# Altium PCB TS.PcbDoc
Units mm, origin at the board's own origin, x right, y up, seen from the top; angles counter-clockwise.
Board outline 46.25 x 27.25 mm, 2 copper layers (Top Layer, Bottom Layer), stack 0.325 mm thick; 71 components, 47 nets, 261 pads, 130 vias.
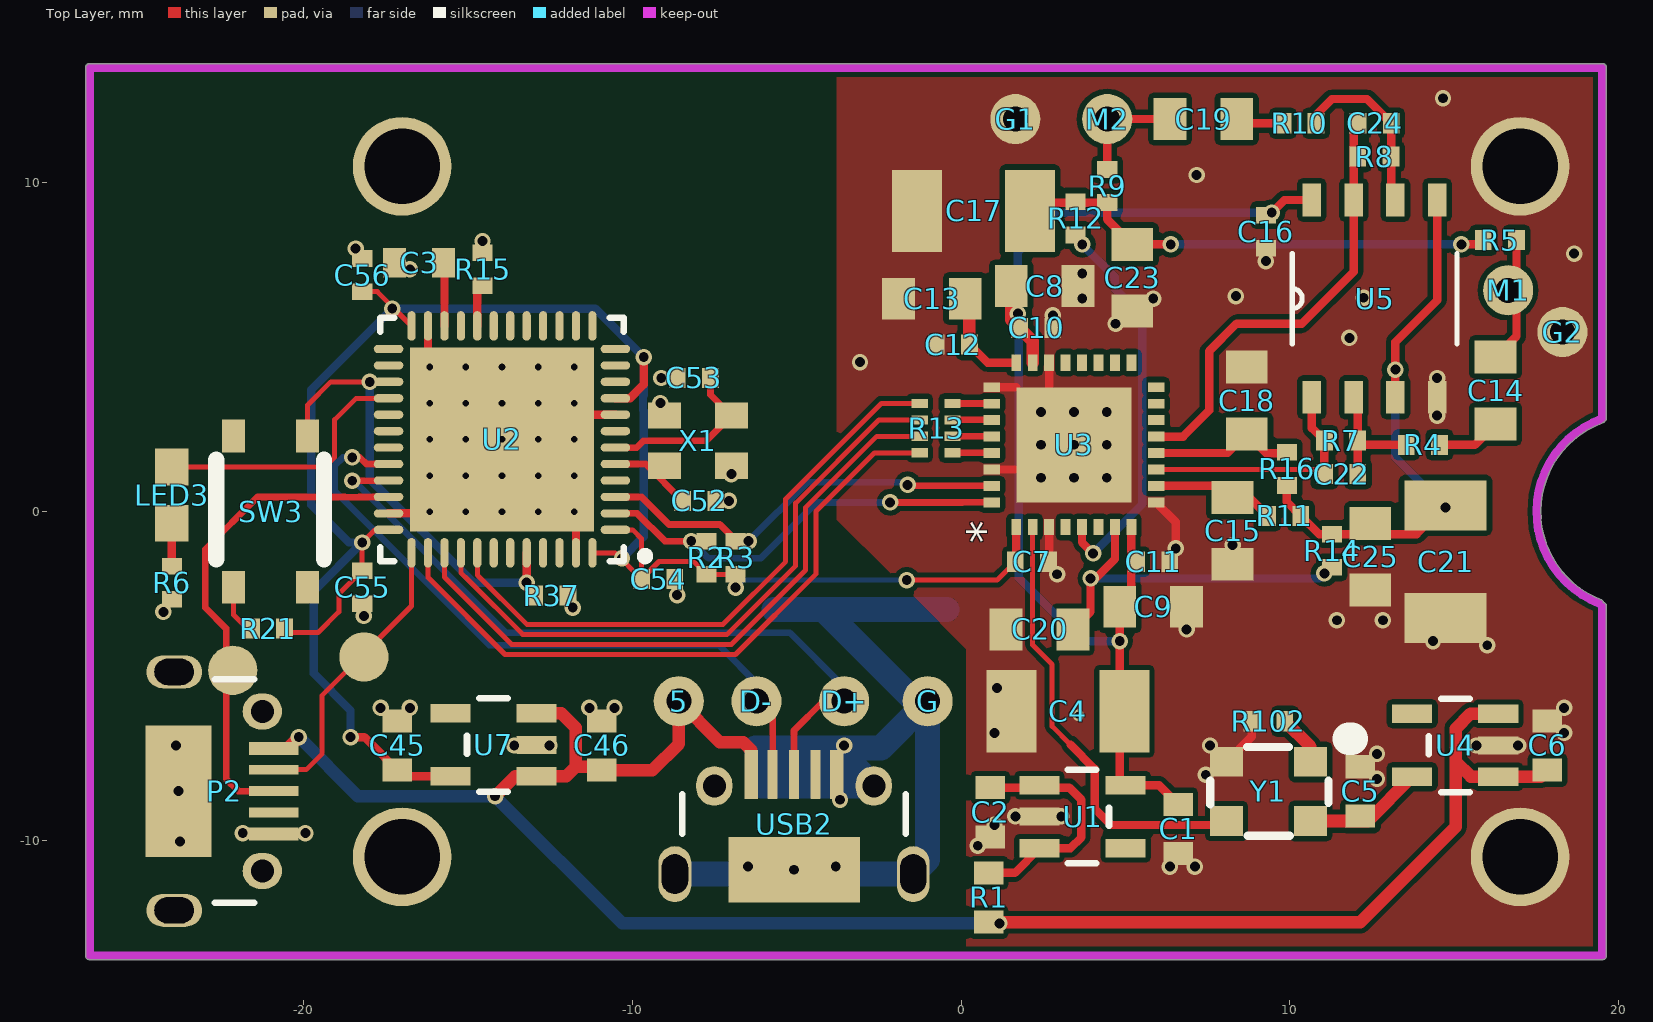
[diagram p0: Top Layer view]
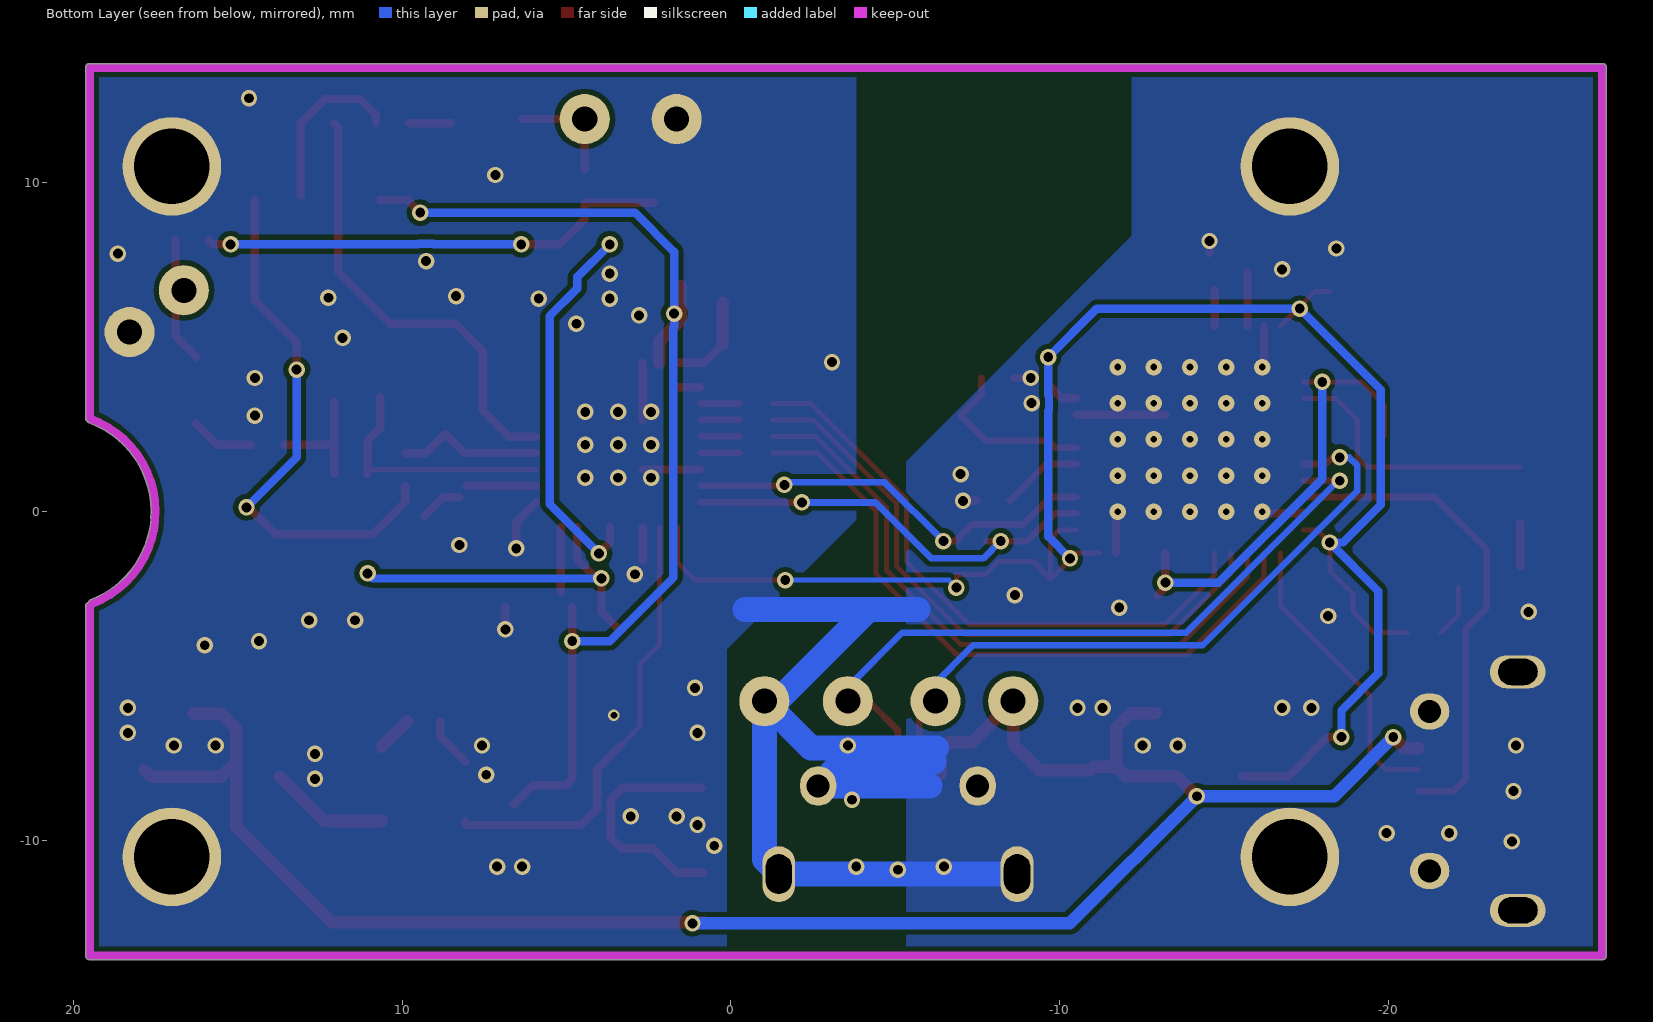
[diagram p1: Bottom Layer view, seen from below]

## Layer stack, top to bottom
Top Solder: solder mask 0.0102, Solder Resist, Dk 3.5
Top Layer: signal copper 0.0356
Dielectric 1: core 0.254, FR-4, Dk 4.2
Bottom Layer: signal copper 0.0356
Bottom Solder: solder mask 0.0102, Solder Resist, Dk 3.5

## Board outline
-26.627,-13.5 ccw(c-26.5,-13.5) -26.5,-13.627 19.5,-13.627 ccw(c19.5,-13.5) 19.627,-13.5 19.627,-2.882 ccw(c19.5,-2.882) 19.537,-2.76 ccw(c19.415,-2.797) 19.461,-2.678 cw(c20.5,0) 19.507,2.696 cw(c20.5,0) 19.508,2.696 ccw(c19.464,2.815) 19.554,2.726 19.554,2.725 19.59,2.762 19.59,2.761 ccw(c19.5,2.852) 19.627,2.852 19.627,13.5 ccw(c19.5,13.5) 19.5,13.627 -26.5,13.627 ccw(c-26.5,13.5) -26.627,13.5

## Design rules (kind name [scope] priority, off if disabled: settings)
Clearance Clearance_1 [(InNamedPolygon('Bottom Layer-No Net')) vs Not InNet('GND')] p1: gap=0.381 ignorepadtopadclearanceinfootprint=FALSE except(0: Arc-Hole Track-Hole SMDPad-Hole THPad-Hole Via-Hole Fill-Hole Poly-Hole Region-Hole Text-Hole)
Clearance [All] p2: gap=0.152 ignorepadtopadclearanceinfootprint=FALSE except(0: Arc-Hole Track-Hole SMDPad-Hole THPad-Hole Via-Hole Fill-Hole Poly-Hole Region-Hole Text-Hole)
DiffPairsRouting [All] p1: maxlimit=0.254 minlimit=0.254 mostfreqgap=0.254 toplayer_minwidth=0.152 toplayer_maxwidth=0.381 toplayer_prefwidth=0.381 bottomlayer_minwidth=0.152 bottomlayer_maxwidth=0.381 bottomlayer_prefwidth=0.381 maxuncoupledlength=12.7
MinimumSolderMaskSliver [All] p1 off: minsoldermaskwidth=0.254
PlaneClearance [All] p1: clearance=0.254
PlaneConnect [All] p1: planeconnectstyle=Direct reliefexpansion=0.508 reliefentries=4 reliefconductorwidth=0.254 reliefairgap=0.254
PolygonConnect [All] p1: connectstyle=Direct reliefconductorwidth=0.254 reliefentries=4 polygonreliefangle="90 Angle" airgapwidth=0.254
RoomDefinition audio [InComponentClass('audio')] p1 off: confinementstyle=ConfineIn formatcopy=TRUE lockcomponents=FALSE outline -45.904,-51.473 -32.904,-51.473 -32.904,-41.723 -45.904,-41.723
RoomDefinition power [InComponentClass('power')] p2 off: confinementstyle=ConfineIn formatcopy=TRUE lockcomponents=FALSE outline -45.904,-33.223 -18.154,-33.223 -18.154,-25.973 -45.904,-25.973
RoomDefinition MCU [InComponentClass('MCU')] p3 off: confinementstyle=ConfineIn formatcopy=TRUE lockcomponents=FALSE outline -33.399,-50.717 26.164,-50.717 26.164,-44.621 -33.399,-44.621
RoutingVias [All] p1: holewidth=0.305 width=0.508 viastyle="Through Hole" minholewidth=0.3 minwidth=0.5 maxholewidth=0.711 maxwidth=1.27
SilkToBoardRegionClearance [All] p1 off:
SilkToSilkClearance [All] p1 off: silktosilkclearance=0.254
SilkToSolderMaskClearance [IsPad] p1 off: minsilkscreentomaskgap=0.254 clearancetoexposedcopper=TRUE
SolderMaskExpansion [All] p1: expansion=0.102
Width [All] p1: maxlimit=1.524 minlimit=0.152 preferedwidth=0.152
23 further rules are at their usual default settings.

## Classes and differential pairs
component class power: C1 C2 C4 C5 C6 C45 C46 R1 U1 U4 U7
component class MCU: 5 C3 C52 C53 C54 C55 C56 D+ D- G LED3 P2 R6 R13 R15 R21 R28 R37 SW3 U2 USB2 X1
component class audio: C7 C8 C9 C10 C11 C12 C13 C14 C15 C16 C17 C18 C19 C20 C21 C22 C23 C24 C25 G1 G2 M1 M2 R2 R3 R4 R5 R7 R8 R9 R10 R11 R12 R14 R16 R102 U3 U5 Y1

## Components (designator, comment, footprint, x,y, rotation, side; value= is the part's Value field where it differs from the comment)
5 "TestPad" TestPad -8.585,-5.766 r90 top
C1 "4.7uF" 0603L 6.604,-9.652 r90 top
C2 "4.7uF" 0603L 0.889,-9.144 r90 top
C3 "Cap" 0603L -16.485,7.569 r0 top value=4.7uF
C4 "220uF,Tan" 1210 3.251,-6.071 r0 top
C5 "4.7uF" 0603L 12.141,-8.509 r270 top
C6 "4.7uF" 0603L 17.831,-7.112 r270 top
C7 "0.1uF" 0402 2.159,-1.524 r180 top
C8 "4.7uF" 0805 2.54,6.858 r180 top
C9 "4.7uF" 0805 5.842,-2.896 r180 top
C10 "0.1uF" 0402 2.286,5.588 r180 top
C11 "0.1uF" 0402 5.842,-1.524 r180 top
C12 "0.1uF" 0402 -0.254,5.08 r0 top
C13 "4.7uF" 0805 -0.889,6.477 r0 top
C14 "10uF" 0805 16.256,3.683 r90 top
C15 "10uF" 0805 8.255,-0.584 r270 top
C16 "4.7uF" 0402 9.271,8.509 r90 top
C17 "200uF" 1210 0.381,9.144 r0 top
C18 "10uF" 0805 8.687,3.378 r270 top
C19 "10uF" 0805 7.366,11.938 r180 top
C20 "4.7uF" 0805 2.388,-3.581 r0 top
C21 "200uF" 1210 14.732,-1.524 r90 top
C22 "NC" 0402 11.557,1.143 r0 top
C23 "4.7uF" 0805 5.207,7.112 r90 top
C24 "100k" 0402 12.573,11.811 r0 top
C25 "4.7uF" 0805 12.446,-1.372 r90 top
C45 "4.7uF" 0603L -17.145,-7.112 r270 top
C46 "4.7uF" 0603L -10.922,-7.112 r270 top
C52 "Cap" 0402 -7.962,0.328 r180 top value=20pF
C53 "Cap" 0402 -8.128,4.064 r0 top value=20pF
C54 "Cap" 0402 -9.212,-2.053 r180 top value=0.1uF
C55 "Cap" 0402 -18.212,-2.303 r90 top value=0.1uF
C56 "Cap" 0402 -18.212,7.197 r270 top value=0.1uF
D+ "TestPad" TestPad -3.556,-5.766 r0 top
D- "TestPad" TestPad -6.223,-5.766 r0 top
G "TestPad" TestPad -1.016,-5.766 r90 top
G1 "TestPad" TestPad 1.651,11.938 r0 top
G2 "TestPad" TestPad 18.288,5.461 r0 top
LED3 "LED0" 0603 -24.003,0.508 r270 top
M1 "TestPad" TestPad 16.637,6.731 r0 top
M2 "TestPad" TestPad 4.445,11.938 r0 top
P2 "SWD_MicroUSB" MICRO-YZX -26.75,-8.5 r270 top
R1 "FB" 0603L 0.838,-11.735 r270 top value=0Ohm
R2 "Res2" 0402 -7.747,-1.397 r270 top value=10k
R3 "Res2" 0402 -6.858,-1.397 r270 top value=10k
R4 "1k" 0402 14.046,2.032 r180 top
R5 "NC" 0402 16.383,8.255 r0 top
R6 "10k" 0402 -24.003,-2.159 r270 top value=0Ohm
R7 "100k" 0402 11.557,2.159 r180 top
R8 "NC" 0402 12.573,10.795 r180 top
R9 "NC" 0402 4.445,9.906 r270 top
R10 "1k" 0402 10.287,11.811 r0 top
R11 "NC" 0402 9.83,-0.127 r180 top
R12 "NC" 0402 3.48,8.915 r90 top
R13 "Res*4" 0402X4 -0.762,2.54 r180 top value=200Ohm
R14 "NC" 0402 11.278,-1.194 r90 top
R15 "10k" 0402 -14.554,7.366 r90 top value=0Ohm
R16 "NC" 0402 9.906,1.295 r90 top
R21 "1k" 0402 -21.082,-3.556 r0 top value=0Ohm
R37 "Res2" 0402 -12.462,-2.553 r0 top value=10k
R102 "NC" 0402 9.347,-6.375 r180 top
SW3 "SW-PB" SW3x4 -21,0 r270 top
U1 "LP5907" SOT23-5 3.683,-9.271 r270 top
U2 "STM32F401CCU6" STM-UFQFPN48_N -13.962,2.197 r180 top
U3 "ADAU1761" ADAU1761 3.429,2.032 r90 top
U4 "LP5907" SOT23-5 15.037,-7.112 r90 top
U5 "OP-2" SO8 12.573,6.477 r90 top
U7 "LP5907" SOT23-5 -14.213,-7.099 r90 top
USB2 "USB Micro Type B" MICRO-YZX -5.08,-13.843 r0 top
X1 "24.000 KHz 3.2x2.5mm 8-10pf" OSCILLATOR-2.5x2.0 -8.001,2.159 r0 top
Y1 "OSC_40M" TXC_7Q 9.347,-8.509 r180 top

## Footprints (in the part's own frame and the unit in brackets; to place one, negate y for a bottom-side part, rotate by r counter-clockwise, add the part's x,y. Pads: shape width x height; smd on the part's side, far side on the other; paste and mask are expansions set on the pad)
0402 [mil] "0402-RES"
  rect 20x24 smd: 1(-19.68,0) 2(20,0)
0402X4 [mm]
  rect 0.5x0.28 smd: 1(-0.5,0.75) 2(-0.5,0.25) 3(-0.5,-0.25) 4(-0.5,-0.75) 5(0.5,-0.75) 6(0.5,-0.25) 7(0.5,0.25) 8(0.5,0.75)
0603 [mil] "0603-RES"
  rect 44x40 smd: 1(-33.46,0) 2(34,0)
  body extent -31,-16 31,16, height 31
0603L [mm]
  rect 0.7x0.9 smd: 1(-0.75,0) 2(0.75,0)
  body extent -0.8,-0.4 0.8,0.4, height 0.8
0805 [mm]
  rect 1x1.27 smd: 1(-1.016,0) 2(1.016,0)
  body extent -1.27,-0.76 1.27,0.76, height 0.8
1210 [mm]
  rect 1.52x2.5 smd: 1(-1.715,0) 2(1.715,0)
ADAU1761 [mm]
  rect 3.5x3.5 smd: 0(0,0)
  rect 0.5x0.3 smd: 1(-2.5,1.75) 2(-2.5,1.25) 3(-2.5,0.75) 4(-2.5,0.25) 5(-2.5,-0.25) 6(-2.5,-0.75) 7(-2.5,-1.25) 8(-2.5,-1.75) 17(2.5,-1.75) 18(2.5,-1.25) 19(2.5,-0.75) 20(2.5,-0.25) 21(2.5,0.25) 22(2.5,0.75) 23(2.5,1.25) 24(2.5,1.75)
  rect 0.3x0.5 smd: 9(-1.75,-2.5) 10(-1.25,-2.5) 11(-0.75,-2.5) 12(-0.25,-2.5) 13(0.25,-2.5) 14(0.75,-2.5) 15(1.25,-2.5) 16(1.75,-2.5) 25(1.75,2.5) 26(1.25,2.5) 27(0.75,2.5) 28(0.25,2.5) 29(-0.25,2.5) 30(-0.75,2.5) 31(-1.25,2.5) 32(-1.75,2.5)
  body extent -2.5,-2.5 2.5,2.5, height 0.8
MICRO-YZX [mm]
  rect 0.4x1.5 smd: 1(-1.3,5.85) 5(1.3,5.85)
  rect 0.3x1.5 smd: 2(-0.65,5.85) 3(0,5.85) 4(0.65,5.85)
  oval 1x1.7 hole 0.8 slot 1.2 at 90 deg: 5(-3.625,2.82) 5(3.625,2.82)
  oval 1.1x1.2 hole 0.7: 5(-2.425,5.5) 5(2.425,5.5)
  rect 4x2 smd: 5(0,2.95)
  silkscreen extent -3.4,4.05 3.4,5.25, body extent -4.02,0.33 3.98,5.93, height 2.6
OSCILLATOR-2.5x2.0 [mm] "OSCILLATOR-3.2X2.5"
  rect 1x0.8 smd: 1(-1.016,-0.762) 2(1.016,-0.762) 3(1.016,0.762) 4(-1.016,0.762)
  body extent -1.27,-1.02 1.27,1.02, height 0.9
SO8 [mm]
  rect 1x0.559 smd: 1(-3,1.905) 2(-3,0.635) 3(-3,-0.635) 4(-3,-1.905) 5(3,-1.905) 6(3,-0.635) 7(3,0.635) 8(3,1.905)
  silkscreen extent -1.37,-2.5 1.37,2.5, body extent -3,-2.45 3,2.45, height 1.63
SOT23-5 [mil] "SOT23-5"
  rect 22x48 smd: 1(-37.4,-51.19) 2(0,-51.19) 3(38,-51.19) 4(38,52) 5(-37.4,52)
  silkscreen extent -56,-17 56,32
STM-UFQFPN48_N [mm] "QFN, 48-Leads, Body 7.1x7.1mm, Pitch 0.5mm, Thermal Pad 5.6x5.6mm, IPC Medium Density"
  oval 0.9x0.25 smd: 1(-3.45,2.75) 2(-3.45,2.25) 3(-3.45,1.75) 4(-3.45,1.25) 5(-3.45,0.75) 6(-3.45,0.25) 7(-3.45,-0.25) 8(-3.45,-0.75) 9(-3.45,-1.25) 10(-3.45,-1.75) 11(-3.45,-2.25) 12(-3.45,-2.75) 25(3.45,-2.75) 26(3.45,-2.25) 27(3.45,-1.75) 28(3.45,-1.25) 29(3.45,-0.75) 30(3.45,-0.25) 31(3.45,0.25) 32(3.45,0.75) 33(3.45,1.25) 34(3.45,1.75) 35(3.45,2.25) 36(3.45,2.75)
  oval 0.25x0.9 smd: 13(-2.75,-3.45) 14(-2.25,-3.45) 15(-1.75,-3.45) 16(-1.25,-3.45) 17(-0.75,-3.45) 18(-0.25,-3.45) 19(0.25,-3.45) 20(0.75,-3.45) 21(1.25,-3.45) 22(1.75,-3.45) 23(2.25,-3.45) 24(2.75,-3.45) 37(2.75,3.45) 38(2.25,3.45) 39(1.75,3.45) 40(1.25,3.45) 41(0.75,3.45) 42(0.25,3.45) 43(-0.25,3.45) 44(-0.75,3.45) 45(-1.25,3.45) 46(-1.75,3.45) 47(-2.25,3.45) 48(-2.75,3.45)
  rect 5.6x5.6 smd: 49(0,0)
  silkscreen extent -4.48,-3.7 3.7,3.7, body extent -3.55,-3.55 3.55,3.55, height 0.6
SW3x4 [mm]
  rect 1x0.7 smd: 1(-2.3,1.125) 2(2.3,-1.125) 3(2.3,1.125) 4(-2.3,-1.125)
  silkscreen extent -1.58,-1.65 1.45,1.63, body extent -2,-1.5 2,1.5, height 2.6
TestPad [mil]
  round 60 hole 30: 1(0,0)
TXC_7Q [mm]
  rect 1x0.9 smd: 1(-1.275,-0.9) 2(1.275,-0.9) 3(1.275,0.9) 4(-1.275,0.9)
  silkscreen extent -2.52,-1.6 1.78,1.35

## Part data
C1 C2 C4 C5 C6 C7 C8 C9 C10 C11 C12 C13 C14 C15 C16 C17 C18 C19 C20 C21 C22 C23 C24 C25 C45 C46: library part Cap, "Capacitor", LatestRevisionDate=17-Jul-2002, LatestRevisionNote="Re-released for DXP Platform.", PackageDescription="Radial Cap, Thru-Hole; 2 Leads; 0.3 in Pin Spacing", PackageReference=RAD-0.3, Published=8-Jun-2000, Publisher="Altium Limited"
C3 C52 C53 C54 C55 C56: "Capacitor", LatestRevisionDate=17-Jul-2002, LatestRevisionNote="Re-released for DXP Platform.", PackageDescription="Radial Cap, Thru-Hole; 2 Leads; 0.3 in Pin Spacing", PackageReference=RAD-0.3, Published=8-Jun-2000, Publisher="Altium Limited"
LED3: "Typical INFRARED GaAs LED", LatestRevisionDate=08-Jul-2005, LatestRevisionNote="Mech Layer 1 removed.", PackageDescription="LED; 2 Leads", PackageReference=LED-0, Published=8-Jun-2000, Publisher="Altium Limited"
P2: "Connector SMD USB Micro Type B middle mount", Manufacturer 1="Molex Inc", Package / Case=SMD, Supplier Part Number 1=WM17142CT-ND, SCDType=undef, Supplier 1=Digi-Key
R1 R4 R5 R6 R7 R8 R9 R10 R11 R12 R14 R15 R16 R21 R102: library part Res2, "Resistor", LatestRevisionDate=17-Jul-2002, LatestRevisionNote="Re-released for DXP Platform.", PackageDescription="Axial Device, Thru-Hole; 2 Leads; 0.4 in Pin Spacing", PackageReference=AXIAL-0.4, Published=8-Jun-2000, Publisher="Altium Limited"
R2 R3 R13 R37: "Resistor", LatestRevisionDate=17-Jul-2002, LatestRevisionNote="Re-released for DXP Platform.", PackageDescription="Axial Device, Thru-Hole; 2 Leads; 0.4 in Pin Spacing", PackageReference=AXIAL-0.4, Published=8-Jun-2000, Publisher="Altium Limited"
SW3: "Switch", LatestRevisionDate=17-Jul-2002, LatestRevisionNote="Re-released for DXP Platform.", PackageDescription="Switch; 2 Leads", PackageReference=SPST-2, Published=24-Mar-1999, Publisher="Altium Limited"
U2: "ARM Cortex-M4 32-bit MCU+FPU, 105 DMIPS, 256 kB Flash, 64 kB Internal RAM, 36 I/Os, 48-pin UFQFPN, -40 to 85 degC, Tray", I/Os (High Current)=36, Manufacturer=STMicroelectronics, Operating Frequency(F) (Processor speed) (MHz)=84, Supplier Part Number 1=19X6217, Supply Voltage(Vcc) max (V)=3.6, Supply Voltage(Vcc) min (V)=1.8, ComponentLink1Description="Manufacturer URL", ComponentLink1URL=http://www.st.com/web/en/home.html, ComponentLink2Description=Datasheet, ComponentLink2URL=http://www.st.com/st-web-ui/static/active/en/resource/technical/document/data_brief/DM00071938.pdf, ComponentLink3Description="Package Specification", ComponentLink3URL=http://www.st.com/st-web-ui/static/active/en/resource/technical/document/data_brief/DM00071938.pdf, Core="ARM Cortex-M4", DatasheetVersion="Rev. 1", FLASH Size (Prog) (kB)=256, Internal RAM Size (kB)=64, Mounting Technology="Surface Mount", PackageDescription="48-Pin Ultra Thin Fine Pitch Quad Flat No-Lead, 7 x 7 x 0.6 mm Body, 0.5 mm Pitch, Exposed Pad", PackageReference=UFQFPN48, PackageVersion="Rev. 1, 04/2013", Packing=Tray, PartNumber=STM32F401CCU6, Supplier 1=Newark, Supplier 2=Mouser, Supplier Part Number 2=511-STM32F401CCU6
USB2: library part USB_Micro_TypeB, "Connector SMD USB Micro Type B middle mount", Manufacturer 1="Molex Inc", Manufacturer Part Number 1=47491-0001, Package / Case=SMD, Supplier Part Number 1=WM17142CT-ND, SCDType=undef, Supplier 1=Digi-Key
X1: library part OSCILLATOR-3.2X2.5, "Crystal Oscillator in 3.2x2.5 SMD"

## Free pads (board coordinates)
  round 1.5 smd: 0(-18.161,-4.42) 8(-22.149,-4.826)
  round 3 hole 2.3: 7(-17,-10.5) 7(-17,10.5) 7(17,-10.5) 7(17,10.5)

## Via types
v1: diameter 0.5, hole 0.3, Top Layer to Bottom Layer, 104 vias
v2: diameter 0.5, hole 0.2, Top Layer to Bottom Layer, 25 vias
v3: diameter 0.35, hole 0.2, Top Layer to Bottom Layer, 1 vias

## Nets (pads, with @x,y where several pads share a name; then routed paths per layer and width w, separated by ;. In a path a pad name is that pad's centre, name@x,y a point inside that pad or via, vN(x,y) a via of type N, cw(c..) or ccw(c..) an arc to the next point about the centre after c; other vN are vias at no path point)
3.3A: C1.2 C4.2 C8.2 C9.2 C10.2 C11.2 C16.2 U1.5 U3.8 U3.23 U5.8 | length 35.3
  Top Layer w0.254: C9.2 v1(4.826,-3.937) 4.826,-8.143 U1.5 6.023,-8.321 C1.2 ; C9.2@5.179,-2.441 U3.8 ; v1(9.449,9.093) 9.833,9.477 U5.8
  Top Layer w0.381: C8.2 1.524,5.842 C10.2 2.179,5.187 U3.23
  Bottom Layer w0.254: v1(4.826,-3.937) 3.683,-3.937 1.753,-2.007 1.753,5.588 1.727,5.613 v1(1.727,6.02) 1.727,7.899 2.921,9.093 v1(9.449,9.093)
3.3Clock: C5.2 U4.5 Y1.4 | length 3.7
  Top Layer w0.381: Y1.4 12.369,-9.409 U4.5
3.3D: C7.2 C45.2 C54.2 C55.2 C56.2 R2.2 R3.2 R21.2 U2.1 U2.9 U2.24 U2.36 U2.48 U3.1 U7.5 | length 60.7
  Top Layer w0.152: R21.2@-20.574,-3.683 -19.558,-3.683 -18.923,-3.048 -18.923,-2.506 C55.2 v1(-18.212,-0.94) -17.825,-0.553 U2.36 ; C56.2 -17.754,6.689 U2.24 ; U2.48 -10.52,-1.253 C54.2 ; U2.1 -9.988,-0.553 -9.72,-0.821 C54.2 ; v1(-6.858,-2.311) R3.2 R2.2 -8.132,-1.52 -9.187,-1.52 C54.2 ; v1(-1.651,-2.083) 1.092,-2.083 C7.2
  Top Layer w0.254: v1(-18.567,-6.858) -18.149,-6.858 -16.958,-8.049 U7.5 ; U2.9 -10.066,3.447 -9.652,3.861 v1(-9.652,4.699) ; C7.2@1.679,-1.496 U3.1
  Bottom Layer w0.152: v1(-6.858,-2.311) -6.629,-2.083 v1(-1.651,-2.083)
  Bottom Layer w0.254: v1(-18.567,-6.858) -18.567,-6.042 -19.685,-4.925 -19.685,-2.413 v1(-18.212,-0.94) -18.618,-0.94 -19.761,0.203 -19.761,3.708 v1(-17.297,6.172) -11.125,6.172 v1(-9.652,4.699) -9.652,3.543 -9.673,3.521 -9.673,3.083 -9.652,3.061 -9.652,-0.762 v1(-10.312,-1.422)
5V: 5.1 C6.2 C46.2 P2.1 R1.2 U4.1 U4.3 U7.1 U7.3 USB2.1 | length 61.1
  Top Layer w0.381: P2.1 -20.484,-7.2 v1(-20.142,-6.858) ; v1(-14.169,-8.657) -13.561,-8.049 U7.1 -12.011,-8.049 -11.715,-7.753 ; U7.3 -12.154,-6.134 -11.715,-6.573 -11.715,-7.753 ; C46.2@-11.031,-7.753 -11.715,-7.753 ; C46.2 -9.386,-7.862 -8.585,-7.061 5.1 -7.341,-7.01 -6.629,-7.01 -6.38,-7.26 USB2.1 ; R1.2 12.141,-12.485 15.037,-9.589 15.037,-7.595 ; U4.3 15.494,-6.147 15.037,-6.604 15.037,-7.595 ; C6.2 17.631,-8.062 U4.1 15.504,-8.062 15.037,-7.595
  Bottom Layer w0.381: v1(-20.142,-6.858) -18.343,-8.657 v1(-14.169,-8.657) -10.304,-12.522 v1(1.168,-12.522)
CM: C21.2 C25.2 R11.1 R14.2 R16.1 U5.3 U5.5 | length 17.4
  Top Layer w0.254: R16.1@9.906,0.77 9.906,0.297 R11.1 10.889,-0.686 R14.2 13.855,-0.686 C21.2 ; U5.3 v1(13.208,4.318) 13.208,5.156 14.478,6.426 U5.5
  Bottom Layer w0.254: v1(13.208,4.318) 13.208,1.651 v1(14.732,0.127)
GND: C1.1 C2.1 C3.1 C4.1 C5.1 C6.1 C7.1 C8.1 C9.1 C10.1 C11.1 C12.1 C13.1 C15.2 C16.1 C17.1 C18.1 C20.1 C21.1 C23.1 C25.1 C45.1 C46.1 C52.1 C53.1 C54.1 C55.1 C56.1 G1.1 G2.1 G.1 P2.5 pad.7 R6.2 R15.2 R37.2 R102.2 U1.2 U2.8 U2.23 U2.35 U2.47 U2.49 U3.0 U3.3 U3.9 U3.22 U3.25 U3.30 U4.2 U5.4 U7.2 USB2.5 X1.2 X1.4 Y1.2 | length 51.7
  Top Layer w0.254: U2.35 U2.49@-16.212,-0.053 ; U2.49@-16.212,4.447 U2.23 ; R15.2 v1(-14.554,8.23) ; U2.49@-13.212,2.947 U2.8 ; U2.47 U2.49@-11.712,-0.053 ; v1(-9.119,4.064) C53.1 ; C52.1 v1(-7.059,0.328) ; U3.30 U3.0@2.679,1.282 ; U3.25 U3.0@1.679,3.782 ; C7.1@2.679,-1.504 U3.3 ; U3.0@2.679,2.782 U3.22 ; U3.9 6.528,-0.317 v1(6.528,-1.118) ; v1(6.858,-3.581) C9.1 ; Y1.2 8.839,-6.842 R102.2
  Bottom Layer w0.762: USB2.5@-8.705,-11.023 -1.455,-11.023 -1.016,-10.584 G.1 -2.438,-7.188 -6.248,-7.188 ; -6.172,-7.62 -3.378,-7.62 -2.655,-8.343 -6.059,-8.343 ; -5.69,-2.972 -4.191,-2.972 ; G.1@-1.397,-5.766 -4.191,-2.972 ; -0.432,-2.972 -4.191,-2.972
  other v1: -5.08,-10.893 -6.477,-10.795 -3.81,-10.795 6.35,-10.795 7.112,-10.795 0.508,-10.16 -23.749,-10.033 -21.844,-9.779 -19.939,-9.779 1.016,-9.525 1.651,-9.271 3.048,-9.271 -3.683,-8.763 -23.8,-8.5 12.649,-8.128 7.442,-8.001 12.649,-7.366 -23.876,-7.112 -13.589,-7.112 -12.522,-7.112 -3.556,-7.112 7.569,-7.112 15.672,-7.112 16.942,-7.112 1.016,-6.731 18.339,-6.731 -17.653,-5.969 -16.764,-5.969 -11.303,-5.969 -10.541,-5.969 18.339,-5.969 1.092,-5.359 16.002,-4.064 14.351,-3.937 11.43,-3.302 12.827,-3.302 -18.161,-3.175 -24.257,-3.048 -11.811,-2.921 -8.636,-2.54 2.921,-1.905 8.255,-1.016 2.429,1.032 3.429,1.032 4.429,1.032 -6.985,1.143 2.429,2.032 3.429,2.032 4.429,2.032 14.478,2.921 2.429,3.032 3.429,3.032 4.429,3.032 -9.144,3.302 14.478,4.064 -3.073,4.547 11.811,5.283 4.699,5.715 2.794,5.969 3.683,6.477 5.842,6.477 12.243,6.502 8.357,6.553 3.683,7.239 -16.764,7.366 9.271,7.62 18.644,7.849 -18.415,8.001 7.163,10.236 14.656,12.573
  other v2: -16.162,-0.003 -15.062,-0.003 -13.962,-0.003 -12.862,-0.003 -11.762,-0.003 -16.162,1.097 -15.062,1.097 -13.962,1.097 -12.862,1.097 -11.762,1.097 -16.162,2.197 -15.062,2.197 -13.962,2.197 -12.862,2.197 -11.762,2.197 -16.162,3.297 -15.062,3.297 -13.962,3.297 -12.862,3.297 -11.762,3.297 -16.162,4.397 -15.062,4.397 -13.962,4.397 -12.862,4.397 -11.762,4.397
  other v3: 3.556,-6.198
KEY: R37.1 SW3.1 U2.27 U2.44 | length 14.1
  Top Layer w0.152: SW3.1 -19.875,3.239 -19.167,3.947 v1(-17.983,3.947) U2.27
  Top Layer w0.254: U2.44 v1(-13.212,-2.159) -13.212,-2.303 R37.1
  Bottom Layer w0.254: v1(-17.983,3.947) -17.983,0.996 -14.828,-2.159 v1(-13.212,-2.159)
NetC2_2: C2.2 R1.1 U1.1 U1.3 | length 7.3
  Top Layer w0.254: R1.1 1.634,-10.985 U1.3 3.327,-10.236 3.658,-9.906 3.658,-8.763 3.289,-8.394 C2.2
NetC3_2: C3.2 U2.22 | length 1.6
  Top Layer w0.254: U2.22 C3.2@-15.712,7.264
NetC12_2: C12.2 C13.2 U3.24 | length 2.9
  Top Layer w0.254: C12.2 0.802,4.532 U3.24
  Top Layer w0.381: C12.2 C13.2@0.254,6.35
NetC14_1: C14.1 R4.1 | length 1.9
  Top Layer w0.254: R4.1@14.597,2.032 15.621,2.032 C14.1
NetC14_2: C14.2 M1.1 R5.2 | length 3.8
  Top Layer w0.254: C14.2 16.891,5.334 R5.2
NetC15_1: C15.1 R11.2 U3.10 | length 3.4
  Top Layer w0.254: U3.10 C15.1@8.032,0.782 ; C15.1 8.763,0.432 R11.2
NetC17_2: C17.2 C23.2 R5.1 R9.2 R12.2 | length 14.4
  Top Layer w0.254: C17.2@2.35,9.398 R9.2 4.445,8.89 C23.2 v1(6.375,8.128) ; v1(15.215,8.128) 15.756,8.128 R5.1
  Bottom Layer w0.254: v1(6.375,8.128) 9.03,8.128 9.052,8.149 9.49,8.149 9.512,8.128 v1(15.215,8.128)
NetC18_2: C18.2 R16.2 U3.12 | length 4.5
  Top Layer w0.254: U3.12 8.107,1.782 C18.2 9.271,1.778 R16.2@9.906,1.778
NetC19_1: C19.1 R10.1 | length 1.3
  Top Layer w0.254: C19.1@8.509,11.811 R10.1
NetC19_2: C19.2 M2.1 R9.1 | length 3.4
  Top Layer w0.254: R9.1 M2.1 C19.2
NetC20_2: C20.2 R14.1 U3.7 | length 10.9
  Top Layer w0.254: C20.2 3.937,-3.048 v1(3.937,-2.032) 4.089,-2.032 4.679,-1.442 U3.7
  Bottom Layer w0.254: v1(3.937,-2.032) 10.897,-2.032 v1(11.049,-1.88)
NetC22_1: C22.1 R7.2 U3.11 U5.1 | length 7.5
  Top Layer w0.152: U3.11 C22.1@10.918,1.282
  Top Layer w0.254: U5.1 10.668,2.54 R7.2 11.049,1.151 C22.1
NetC22_2: C22.2 R4.2 R7.1 U5.2 | length 3.8
  Top Layer w0.254: R7.1 R7.1@12.065,2.151 ; C22.2 R7.1@12.065,2.151 ; U5.2@12.065,3.35 R7.1@12.065,2.151 ; R4.2@13.589,2.032 12.184,2.032 R7.1@12.065,2.151
NetC24_1: C24.1 R8.2 U3.13 U5.7 | length 13.7
  Top Layer w0.254: U3.13 6.752,2.282 7.544,3.073 7.544,4.877 8.382,5.715 10.363,5.715 11.938,7.29 U5.7 11.938,11.676 C24.1
NetC24_2: C24.2 R8.1 R10.2 U5.6 | length 5.3
  Top Layer w0.254: R10.2 10.795,12.065 11.278,12.548 12.344,12.548 C24.2 U5.6@13.081,9.604
NetC52_2: C52.2 U2.5 X1.1 | length 2.5
  Top Layer w0.203: U2.5 -9.589,1.447 C52.2
NetC53_2: C53.2 U2.6 X1.3 | length 5.3
  Top Layer w0.203: U2.6 -9.864,1.947 -9.652,2.159 -7.747,2.159 X1.3 -7.62,3.556 C53.2
NetLED3_1: LED3.1 U2.28 | length 8.1
  Top Layer w0.152: LED3.1 -19.343,1.358 -19.05,1.651 -19.05,2.794 -18.397,3.447 U2.28
NetLED3_2: LED3.2 R6.1 | length 1.3
  Top Layer w0.254: R6.1 LED3.2
NetR2_1: R2.1 U2.2 U3.32 | length 13.2
  Top Layer w0.203: U2.2 -9.853,-0.053 -9.009,-0.897 v1(-8.204,-0.897) R2.1 ; v1(-2.159,0.279) 0.046,0.279 U3.32
  Bottom Layer w0.203: v1(-8.204,-0.897) -7.679,-1.422 -6.096,-1.422 -4.394,0.279 v1(-2.159,0.279)
NetR3_1: R3.1 U2.3 U3.31 | length 12.8
  Top Layer w0.203: U2.3 -9.718,0.447 -8.882,-0.389 -7.337,-0.389 -6.858,-0.868 R3.1 v1(-6.46,-0.897) ; v1(-1.626,0.813) -1.595,0.782 U3.31
  Bottom Layer w0.203: v1(-6.46,-0.897) -4.674,0.889 -1.702,0.889 v1(-1.626,0.813)
NetR12_1: R12.1 U3.5 | length 11.7
  Top Layer w0.254: U3.5 3.679,-0.936 v1(4.013,-1.27)
  Bottom Layer w0.254: v1(3.683,8.128) 4.674,7.137 4.674,6.782 5.512,5.944 5.512,0.229 v1(4.013,-1.27)
NetR13_1: R13.1 U3.29 | length 1.2
  Top Layer w0.203: R13.1 U3.29@0.921,1.79
NetR13_2: R13.2 U3.28 | length 1.2
  Top Layer w0.203: R13.2 U3.28@0.921,2.29
NetR13_3: R13.3 U3.27 | length 1.2
  Top Layer w0.203: R13.3 U3.27@0.921,2.79
NetR13_4: R13.4 U3.26 | length 1.2
  Top Layer w0.203: R13.4 U3.26@0.921,3.29
NetR13_5: R13.5 U2.41 | length 18.6
  Top Layer w0.152: U2.41 -14.712,-1.925 -13.208,-3.429 -7.239,-3.429 -5.334,-1.524 -5.334,0.381 -2.425,3.29 R13.5
NetR13_6: R13.6 U2.40 | length 19.1
  Top Layer w0.152: U2.40 -15.212,-1.856 -14.986,-2.082 -13.334,-3.734 -7.113,-3.734 -5.029,-1.65 -5.029,0.255 -2.494,2.79 R13.6
NetR13_7: R13.7 U2.39 | length 19.8
  Top Layer w0.152: U2.39 -15.712,-1.992 -13.665,-4.039 -6.986,-4.039 -4.724,-1.777 -4.724,0.128 -2.563,2.29 R13.7
NetR15_1: R15.1 U2.20 | length 1.1
  Top Layer w0.254: U2.20 R15.1@-14.712,6.734
NetR21_1: R21.1 SW3.2 | length 1.6
  Top Layer w0.152: SW3.2 -22.125,-3.14 R21.1@-21.582,-3.683
NetR102_1: R102.1 Y1.1 | length 1.1
  Top Layer w0.381: R102.1 10.622,-7.15
NetU3_2: U3.2 Y1.3 | length 13.7
  Top Layer w0.152: U3.2 2.176,-0.468 2.176,-4.056 2.769,-4.648 2.769,-6.528 3.327,-7.087
  Top Layer w0.254: 3.327,-7.087 4.064,-7.823 4.064,-9.03 4.566,-9.531 8.072,-9.531 Y1.3
PA9: U2.30
PA10: U2.31
PA11: D-.1 U2.32 USB2.2 | length 19.8
  Top Layer w0.203: v1(-18.517,1.651) -18.288,1.651 -18.084,1.447 U2.32 ; USB2.2 D-.1@-5.73,-6.259
  Bottom Layer w0.203: v1(-18.517,1.651) -18.796,1.651 -19.05,1.397 -19.05,0.635 -14.351,-4.064 -7.366,-4.064 D-.1@-6.096,-5.334
PA12: D+.1 U2.33 USB2.3 | length 21.3
  Top Layer w0.203: v1(-18.517,0.94) -17.419,0.94 U2.33 ; USB2.3 -5.08,-6.655 D+.1@-4.191,-5.766
  Bottom Layer w0.203: v1(-18.517,0.94) -18.466,0.94 -13.843,-3.683 -5.207,-3.683 D+.1@-3.556,-5.334
PA13: P2.3 pad.8 U2.34 | length 15.1
  Top Layer w0.203: P2.3 -21.98,-8.5 -22.352,-8.128 -22.352,-3.556 -22.987,-2.921 -22.987,-1.143 -21.397,0.447 -18.737,0.447 -18.725,0.436 -18.308,0.436 -18.301,0.443 -18.264,0.443 -18.26,0.447 U2.34
PA14: P2.2 pad.0 U2.37 | length 8.9
  Top Layer w0.152: P2.2 -19.915,-7.85 -19.431,-7.366 -19.431,-5.588 -16.712,-2.869 U2.37
PA15: R13.8 U2.38 | length 20.3
  Top Layer w0.152: U2.38 -16.212,-2 -13.868,-4.343 -6.86,-4.343 -4.42,-1.903 -4.42,0.002 -2.632,1.79 R13.8
pads on no net: P2.4 SW3.3 SW3.4 U1.4 U2.4 U2.7 U2.10 U2.11 U2.12 U2.13 U2.14 U2.15 U2.16 U2.17 U2.18 U2.19 U2.21 U2.25 U2.26 U2.29 U2.42 U2.43 U2.45 U2.46 U3.4 U3.6 U3.14 U3.15 U3.16 U3.17 U3.18 U3.19 U3.20 U3.21 U4.4 U7.4 USB2.4

## Polygon pours and split planes (outlines as drawn)
GND on Bottom Layer "GND_L02_P004" (solid, remove dead copper, pour order 4): -3.81,13.5 -3.81,3.175 -3.81,-0.254 0.127,-4.191 0.127,-13.5 19.5,-13.5 19.5,13.5
GND on Bottom Layer "GND_L02_P002" (solid, remove dead copper, pour order 2): -12.192,13.5 -12.192,8.382 -5.334,1.524 -5.334,-13.5 -26.5,-13.5 -26.5,13.5
GND on Top Layer "GND_L01_P006" (solid, remove dead copper, pour order 6): -3.777,13.513 -3.777,3.188 -3.777,-0.241 0.16,-4.178 0.16,-13.487 19.533,-13.487 19.533,13.513

## Keep-outs
Keep-Out Layer:
  lines w0.254: 19.415,-2.797 cw(c20.5,0) 19.464,2.815 19.5,2.852 19.5,13.5 -26.5,13.5 -26.5,-13.5 19.5,-13.5 19.5,-2.882

## Text inside footprints (layer, text, board x,y; h text height)
R13: Mechanical 1 "R1" at -0.942,2.739 h0.3 r270
U3: Top Overlay "*" at 1.179,-0.968 h1 r90